# Altium PCB PCB1_v01.PcbDoc
Units mm, origin at the board's own origin, x right, y up, seen from the top; angles counter-clockwise.
Board outline 100.71 x 75.2 mm, 2 copper layers (Top Layer, Bottom Layer); 128 components, 82 nets, 373 pads, 165 vias.
Unrouted connection lines stored in the file: 136.
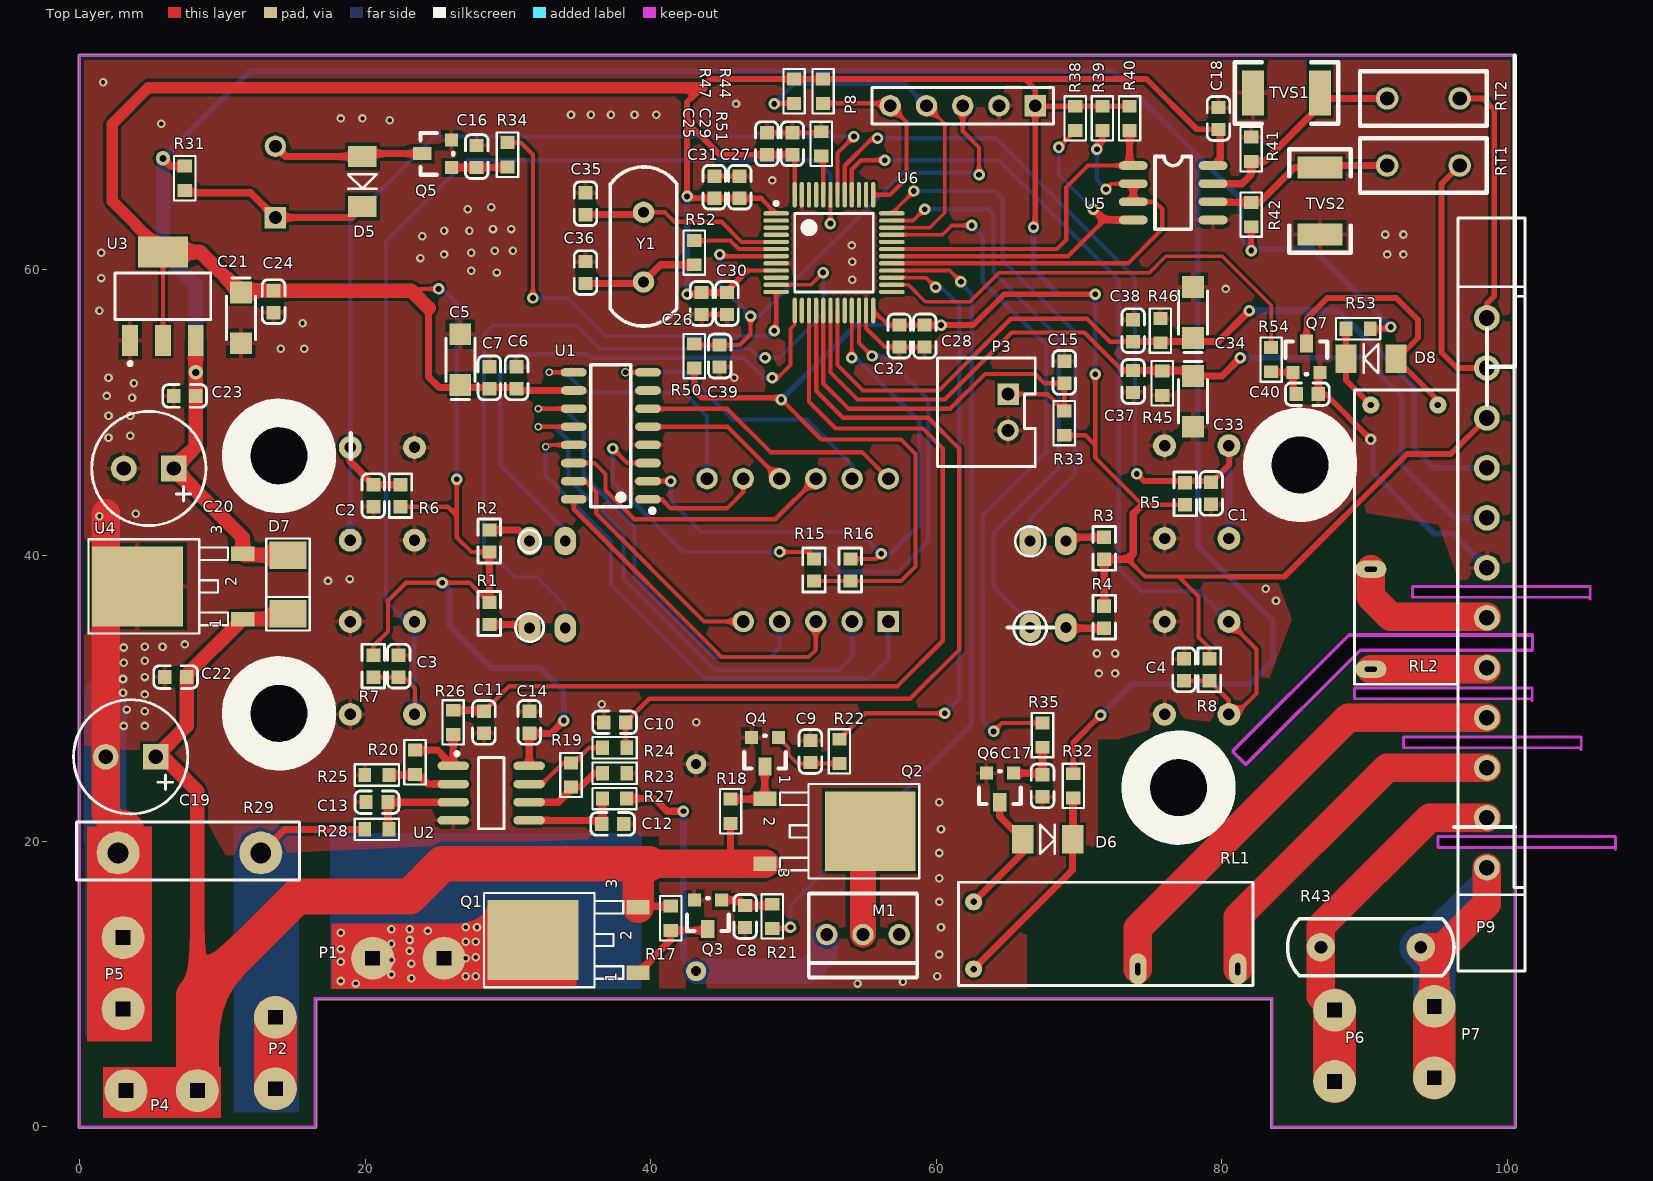
[diagram p0: Top Layer view]
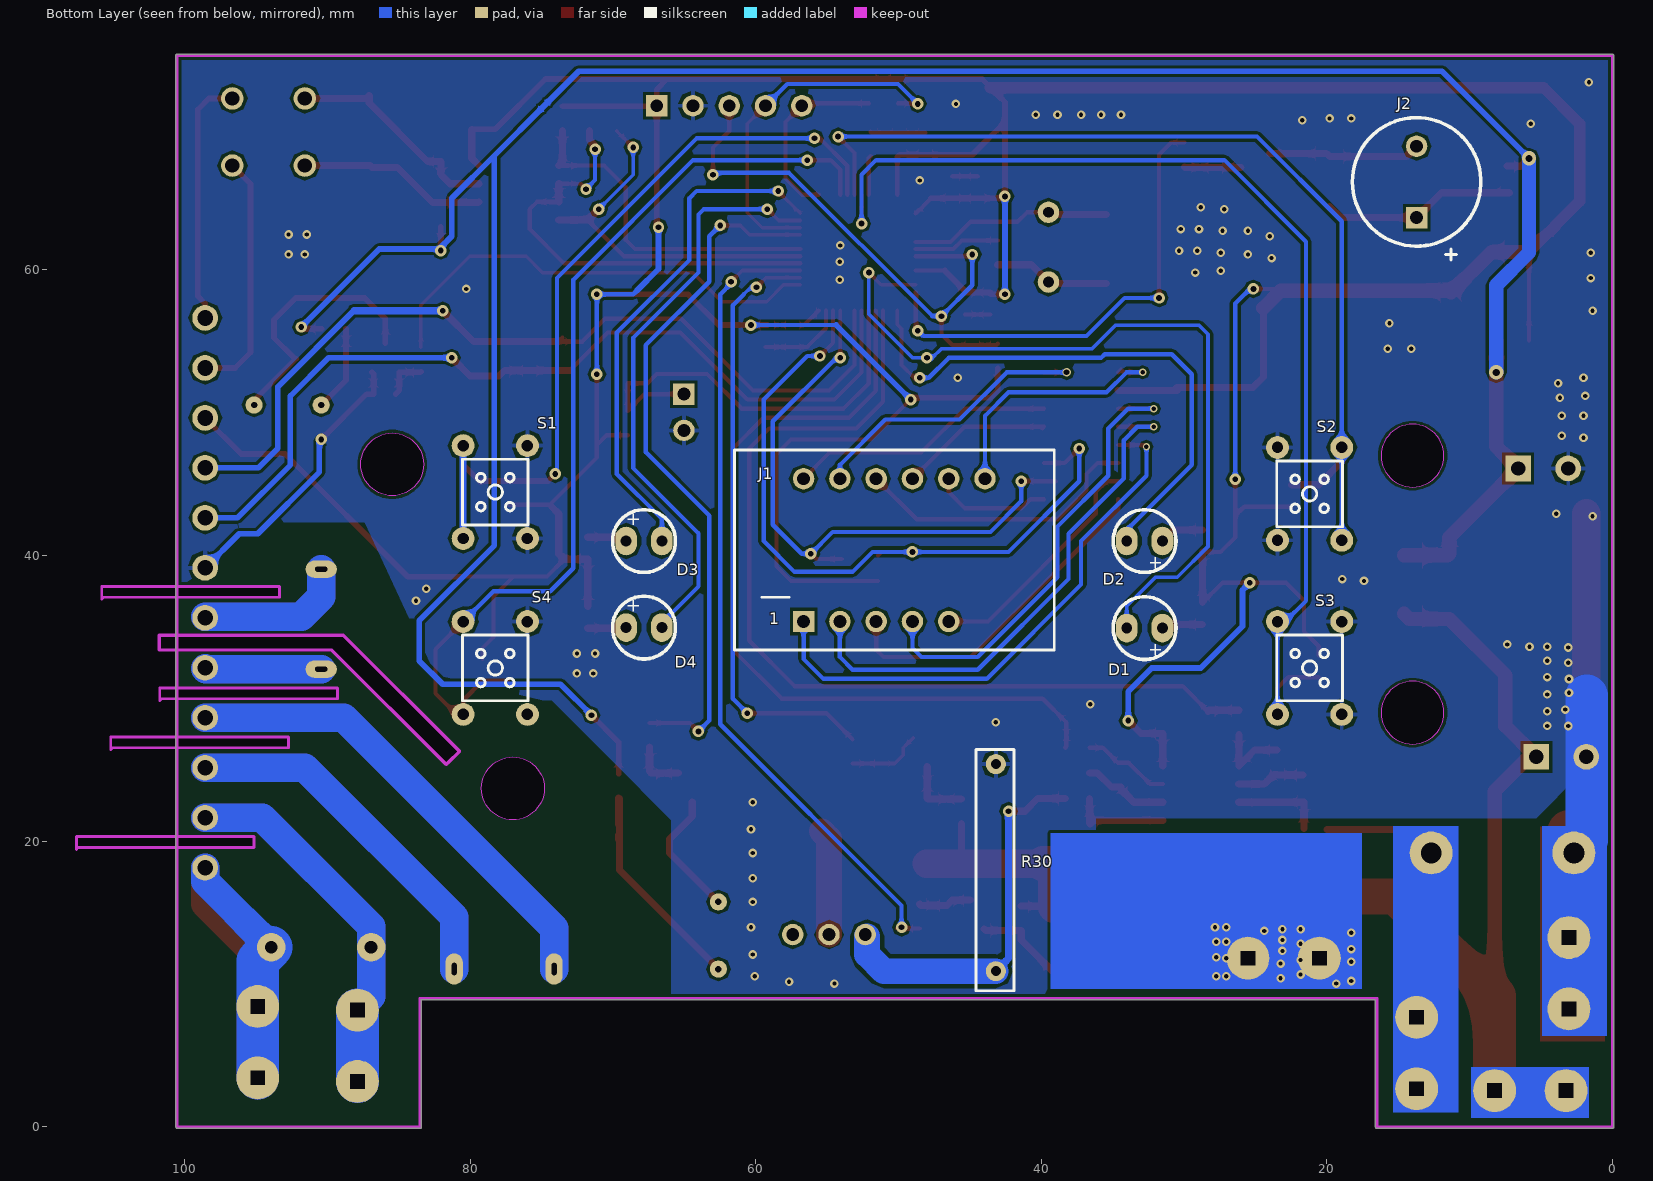
[diagram p1: Bottom Layer view, seen from below]

## Layer stack, top to bottom
Top Solder: solder mask 0.0102, Solder Resist, Dk 3.5
Top Layer: signal copper 0.0356
Dielectric 1: dielectric 0.32, FR-4, Dk 4.8
Bottom Layer: signal copper 0.0356
Bottom Solder: solder mask 0.0102, Solder Resist, Dk 3.5

## Board outline
-0.1,0 ccw(c0,0) 0,-0.1 16.5,-0.1 ccw(c16.5,0) 16.6,0 16.6,8.9 83.4,8.9 83.4,0.061 ccw(c83.5,0.061) 83.404,0.031 ccw(c83.5,0) 83.5,-0.1 100.5,-0.1 ccw(c100.5,0) 100.6,0 100.6,74.949 ccw(c100.514,75) 100.614,75 ccw(c100.514,75) 100.514,75.1 0,75.1 ccw(c0,75) -0.1,75
cut-out: 14,44.8 cw(c14,47) 11.8,47 cw(c14,47) 14,49.2 cw(c14,47) 16.2,47 cw(c14,47)
cut-out: 14,26.8 cw(c14,29) 11.8,29 cw(c14,29) 14,31.2 cw(c14,29) 16.2,29 cw(c14,29)
cut-out: 83.25,46.39 ccw(c85.45,46.39) 85.45,44.19 ccw(c85.45,46.39) 87.65,46.39 ccw(c85.45,46.39) 85.45,48.59 ccw(c85.45,46.39)
cut-out: 74.8,23.7 ccw(c77,23.7) 77,21.5 ccw(c77,23.7) 79.2,23.7 ccw(c77,23.7) 77,25.9 ccw(c77,23.7)
cut-out: 81.463,25.456 ccw(c81.534,25.527) 81.566,25.432 ccw(c81.661,25.4) 81.732,25.329 89.704,33.301 101.727,33.301 ccw(c101.727,33.401) 101.827,33.401 101.827,34.417 ccw(c101.727,34.417) 101.727,34.517 88.9,34.517 ccw(c88.9,34.417) 88.829,34.488 80.701,26.36 ccw(c80.772,26.289) 80.701,26.218
cut-out: 95.123,19.558 95.123,20.32 107.569,20.32 107.569,19.431 107.442,19.558
cut-out: 92.71,26.543 92.71,27.305 105.156,27.305 105.156,26.416 105.029,26.543
cut-out: 93.345,37.084 93.345,37.846 105.791,37.846 105.791,36.957 105.664,37.084
cut-out: 89.281,29.972 89.281,30.734 101.727,30.734 101.727,29.845 101.6,29.972

## Design rules (kind name [scope] priority, off if disabled: settings)
Clearance [All] p1: gap=0.2 ignorepadtopadclearanceinfootprint=FALSE except(0: Arc-Hole Track-Hole SMDPad-Hole THPad-Hole Via-Hole Fill-Hole Poly-Hole Region-Hole Text-Hole)
PolygonConnect PolygonConnect_1 [IsVia] p1: connectstyle=Direct reliefconductorwidth=0.3 reliefentries=4 polygonreliefangle="90 Angle" airgapwidth=0.254
PolygonConnect [All] p2: connectstyle=Relief reliefconductorwidth=0.3 reliefentries=4 polygonreliefangle="90 Angle" airgapwidth=0.254
RoutingVias [All] p1: holewidth=0.4 width=0.9 viastyle="Through Hole" minholewidth=0.305 minwidth=0.305 maxholewidth=0.711 maxwidth=1.27
SolderMaskExpansion [All] p1: expansion=0.102
UnRoutedNet UnRoutedNet_1 [All] p1:
UnRoutedNet [All] p2:
Width [All] p1: maxlimit=5 minlimit=0.2 preferedwidth=0.254
29 further rules are at their usual default settings.

## Classes and differential pairs
component class Main: C8 C9 C10 C11 C12 C13 C14 C15 C16 C17 C40 D5 D6 D8 J2 M1 P1 P2 P3 Q1 Q2 Q3 Q4 Q5 Q6 Q7 R17 R18 R19 R20 R21 R22 R23 R24 R25 R26 R27 R28 R29 R30 R31 R32 R33 R34 R35 R53 R54 RL1 RL2 U2
component class HMI: C1 C2 C3 C4 C5 C6 C7 D1 D2 D3 D4 J1 R1 R2 R3 R4 R5 R6 R7 R8 R15 R16 S1 S2 S3 S4 U1
component class CPU: C18 C19 C20 C21 C22 C23 C24 C25 C26 C27 C28 C29 C30 C31 C32 C33 C34 C35 C36 C37 C38 C39 D7 P4 P5 P6 P7 P8 P9 R38 R39 R40 R41 R42 R43 R44 R45 R46 R47 R50 R51 R52 RT1 RT2 TVS1 TVS2 U3 U4 U5 U6 Y1

## Components (designator, comment, footprint, x,y, rotation, side; value= is the part's Value field where it differs from the comment)
C1 "100nF (104) 10% 50V" 0603_C 79.248,44.358 r90 top
C2 "100nF (104) 10% 50V" 0603_C 20.574,44.196 r90 top
C3 "100nF (104) 10% 50V" 0603_C 22.352,32.258 r270 top
C4 "100nF (104) 10% 50V" 0603_C 77.343,32.004 r270 top
C5 "4.7uF/16V" CAP-1206 26.67,53.721 r90 top value=4.7uF
C6 "1uF (105) 10% 50V" 0603_C 30.607,52.451 r270 top
C7 "100nF (104) 10% 50V" 0603_C 28.702,52.451 r270 top
C8 "100nF (104) 10% 50V" 0603_C 46.609,14.732 r90 top
C9 "100nF (104) 10% 50V" 0603_C 51.181,26.289 r270 top
C10 "100nF (104) 10% 50V" 0603_C 37.473,28.321 r0 top
C11 "100nF (104) 10% 50V" 0603_C 28.321,28.321 r90 top
C12 "100nF (104) 10% 50V" 0603_C 37.338,21.209 r180 top
C13 "100nF (104) 10% 50V" 0603_C 20.828,22.733 r0 top
C14 "100nF (104) 10% 50V" 0603_C 31.496,28.321 r270 top
C15 "100nF (104) 10% 50V" 0603_C 68.961,52.832 r270 top
C16 "100nF (104) 10% 50V" 0603_C 27.813,67.945 r270 top
C17 "100nF (104) 10% 50V" 0603_C 67.437,23.876 r90 top
C18 "100nF (104) 10% 50V" 0603_C 79.756,70.612 r90 top
C19 "100uF/25V" C-RB-8 5.334,25.908 r180 top value=100uF
C20 "100uF/16V" C-RB-8 6.604,46.101 r180 top value=100uF
C21 "4.7uF/16V" CAP-1206 11.303,56.642 r270 top value=4.7uF
C22 "100nF (104) 10% 50V" 0603_C 6.731,31.496 r0 top
C23 "100nF (104) 10% 50V" 0603_C 7.366,51.181 r0 top
C24 "100nF (104) 10% 50V" 0603_C 13.589,57.785 r90 top
C25 "1uF (105) 10% 50V" 0603_C 48.133,68.842 r270 top
C26 "1uF (105) 10% 50V" 0603_C 43.561,57.658 r90 top
C27 "1uF (105) 10% 50V" 0603_C 46.228,65.794 r270 top
C28 "1uF (105) 10% 50V" 0603_C 59.182,55.372 r90 top
C29 "100nF (104) 10% 50V" 0603_C 49.911,68.842 r270 top
C30 "100nF (104) 10% 50V" 0603_C 45.339,57.658 r90 top
C31 "100nF (104) 10% 50V" 0603_C 44.45,65.794 r270 top
C32 "100nF (104) 10% 50V" 0603_C 57.404,55.372 r90 top
C33 "4.7uF/16V" CAP-1206 77.978,50.8 r270 top value=4.7uF
C34 "4.7uF/16V" CAP-1206 77.978,57.023 r90 top value=4.7uF
C35 "22pF (220) 5% 50V" 0603_C 35.433,64.643 r90 top
C36 "22pF (220) 5% 50V" 0603_C 35.433,59.817 r90 top
C37 "100nF (104) 10% 50V" 0603_C 73.787,52.197 r90 top
C38 "100nF (104) 10% 50V" 0603_C 73.787,55.753 r270 top
C39 "100nF (104) 10% 50V" 0603_C 44.831,53.975 r90 top
C40 "100nF (104) 10% 50V" 0603_C 85.979,51.308 r180 top
D1 "LED" LED(С) 32.766,34.925 r0 bottom locked
D2 "LED" LED(С) 32.766,41.021 r0 bottom locked
D3 "LED" LED(С) 67.818,41.021 r180 bottom locked
D4 "LED" LED(С) 67.818,34.96 r180 bottom locked
D5 "1N4148" DIODE-1206 19.812,67.945 r270 top
D6 "1N4148" DIODE-1206 66.04,20.135 r0 top
D7 "M7" DO214AC-SMA 14.605,37.973 r270 top
D8 "1N4148" DIODE-1206 92.185,53.791 r180 top
J1 "DPY-3CK" DYP-3BIT_2.8 50.292,40.386 r180 bottom locked
J2 "BEEP" Beep0905 13.716,66.167 r90 bottom
M1 "风机" connector3x2.5 54.864,13.462 r270 top
P1 "Cold+" ConSlice0.5 25.527,11.811 r180 top
P2 "Cold-" ConSlice0.5 13.716,2.667 r90 top
P3 "NTC" HDR1X2_2 65.024,50.038 r90 top
P4 "+12V" ConSlice0.5 8.255,2.54 r180 top
P5 "" ConSlice0.5 3.048,8.255 r90 top
P6 "L" ConSlice0.5 87.884,3.175 r90 top
P7 "N" ConSlice0.5 94.869,3.429 r90 top
P8 "Header 5" HDR1X5 66.929,71.501 r180 top
P9 "Header 12" HDR3.5-12P_1 98.552,56.642 r270 top
Q1 "IRFR5305" DPAK 35.433,13.081 r90 top
Q2 "IRFR5305" DPAK 51.689,20.701 r270 top
Q3 "SS8050" SOT-23 44.958,15.875 r180 top
Q4 "SS8050" SOT-23 48.952,27.254 r180 top
Q5 "SS8050" SOT-23 26.035,67.183 r90 top
Q6 "SS8050" SOT-23 65.405,24.765 r180 top
Q7 "SS8050" SOT-23 84.963,52.832 r0 top
R1 "2k" 0603_R 28.702,35.941 r270 top
R2 "2k" 0603_R 28.702,41.021 r90 top
R3 "2k" 0603_R 71.755,40.513 r90 top
R4 "2k" 0603_R 71.755,35.687 r270 top
R5 "10K" 0603_R 77.429,44.323 r270 top
R6 "10K" 0603_R 22.479,44.196 r270 top
R7 "10K" 0603_R 20.574,32.258 r90 top
R8 "10K" 0603_R 79.121,32.004 r90 top
R15 "10K" 0603_R 51.435,38.989 r270 top
R16 "10K" 0603_R 53.975,38.989 r270 top
R17 "4.7K" RESC1608N-R0603 41.402,14.605 r270 top
R18 "4.7K" RESC1608N-R0603 45.593,22.098 r90 top
R19 "30K" RESC1608N-R0603 34.417,24.638 r270 top
R20 "100K" RESC1608N-R0603 23.495,25.527 r270 top
R21 "1K" RESC1608N-R0603 48.514,14.732 r270 top
R22 "1K" RESC1608N-R0603 53.213,26.289 r90 top
R23 "2k" RESC1608N-R0603 37.473,24.765 r0 top
R24 "10K" RESC1608N-R0603 37.473,26.543 r180 top
R25 "2k" RESC1608N-R0603 20.828,24.638 r180 top
R26 "10K" RESC1608N-R0603 26.162,28.321 r270 top
R27 "2k" RESC1608N-R0603 37.465,22.987 r0 top
R28 "2k" RESC1608N-R0603 20.828,20.828 r180 top
R29 "30mR" Rsense10mm 2.7,19.177 r0 top value=2mR
R30 "2.2R" R0.4x14.5 43.18,25.4 r270 bottom value=2mR
R31 "3.3R" RESC1608N-R0603 7.366,66.421 r270 top
R32 "3.3R" RESC1608N-R0603 69.596,23.876 r270 top
R33 "100K" RESC1608N-R0603 68.961,49.276 r90 top
R34 "1K" RESC1608N-R0603 29.972,68.072 r90 top
R35 "1K" RESC1608N-R0603 67.437,27.432 r90 top
R38 "4.7K" RESC1608N-R0603 69.723,70.612 r270 top
R39 "4.7K" RESC1608N-R0603 71.628,70.612 r270 top
R40 "4.7K" RESC1608N-R0603 73.533,70.612 r270 top
R41 "10k" RESC1608N-R0603 82.042,68.453 r270 top
R42 "10k" RESC1608N-R0603 82.042,63.881 r270 top
R43 "10D471" 10D471K 90.424,12.573 r180 top
R44 "10k" RESC1608N-R0603 52.07,72.517 r270 top
R45 "100K" RESC1608N-R0603 75.819,52.07 r270 top
R46 "100K" RESC1608N-R0603 75.692,55.753 r90 top
R47 "10k" RESC1608N-R0603 50.038,72.517 r270 top
R50 "10k" RESC1608N-R0603 43.053,53.975 r90 top
R51 "100k" RESC1608N-R0603 51.943,68.834 r90 top
R52 "0R" RESC1608N-R0603 43.053,61.214 r270 top
R53 "3.3R" RESC1608N-R0603 89.535,55.88 r180 top
R54 "1K" RESC1608N-R0603 83.439,53.721 r90 top
RL1 "TXS2-24V" ALDP112 62.611,11.049 r0 top
RL2 "TXS2-24V" ALDP112 90.424,50.546 r270 top
RT1 "BK250-080" RAD0.2 96.647,67.31 r180 top
RT2 "BK250-080" RAD0.2 96.647,72.009 r180 top
S1 "SET/ESC" Switch_4_6*6 78.232,44.45 r270 bottom locked
S2 "Auto/Man" Switch_4_6*6 21.209,44.323 r90 bottom locked
S3 "Up" Switch_4_6*6 21.209,32.131 r270 bottom locked
S4 "Down" Switch_4_6*6 78.232,32.131 r270 bottom locked
TVS1 "SMBJ6.5CA" 1812 82.169,72.39 r0 top
TVS2 "SMBJ6.5CA" 1812 86.868,67.183 r270 top
U1 "TM1650" SOIC-16_150mil 37.211,48.387 r90 top
U2 "LM358" NSO8_N 28.829,23.368 r0 top
U3 "SPX1117-M3-3.3" SOT223 5.842,58.166 r0 top
U4 "LM78M05" DPAK 7.747,37.846 r90 top
U5 "SN65HVD3082" SO-8 73.787,67.31 r0 top
U6 "STM32F030C8T6" STM-LQFP48_N 52.832,61.214 r0 top
Y1 "8MHz" HC49S_th 39.497,61.595 r270 top

## Footprints (in the part's own frame and the unit in brackets; to place one, negate y for a bottom-side part, rotate by r counter-clockwise, add the part's x,y. Pads: shape width x height; smd on the part's side, far side on the other; paste and mask are expansions set on the pad)
10D471K [mm]
  round 2 hole 0.9: 1(-3.5,0) 2(3.5,0)
  silkscreen extent -5.83,-2 5.83,2
0603_C [mm]
  rect 0.93x0.98 smd: 1(-0.77,0) 2(0.77,0)
  silkscreen extent -1.53,-0.79 1.54,0.79, body extent -0.8,-0.4 0.8,0.4, height 0.3
0603_R [mm]
  rect 0.93x0.98 smd: 1(-0.77,0) 2(0.77,0)
  silkscreen extent -1.53,-0.79 1.54,0.79, body extent -0.85,-0.4 0.85,0.4, height 0.56
1812 [mil]
  rect 60x125 smd: 1(0,0) 2(185,0)
  silkscreen extent -50,-85 235,85
ALDP112 [mm]
  round 1.2 hole 0.45: 1(0,0) 2(0,4.7)
  rrect100% 1.2x2.2 hole 0.35 slot 0.85 at 90 deg: 3(11.5,0) 4(18.5,0)
  silkscreen extent -1.05,-1.14 19.56,6.08
Beep0905 [mm] "蜂鸣器"
  rect 1.5x1.5 hole 0.9: 1(-2.5,0)
  round 1.5 hole 0.9: 2(2.5,0)
  silkscreen extent -5.46,-4.5 4.5,4.5
C-RB-8 [mm] "35V 220UF电容"
  rect 1.8x1.8 hole 1: 1(0,0)
  round 1.8 hole 1: 2(3.5,0)
  silkscreen extent -2.25,-4 5.75,4
CAP-1206 [mil] "贴片元件"
  rect 60x60 smd: 1(-70,0) 2(70,0)
  silkscreen extent -110,-40 60,40, body extent -65,-35 65,35, height 39
connector3x2.5 [mm]
  round 1.5 hole 0.9: 1(0,-2.54) 2(0,0) 3(0,2.54)
  silkscreen extent -2.88,-3.81 3.01,3.81
ConSlice0.5 [mm]
  round 3 hole 1 square: 1(0,0) 2(5,0)
DIODE-1206 [mm] "玻璃封装二极管"
  rect 1.5x2 smd: 1(0,0) 2(3.5,0)
  silkscreen extent 1.25,-1 2.25,1
DO214AC-SMA [mil]
  rect 75x102 smd: 1(-80.7,0) 2(80.7,0)
  silkscreen extent -127,-60 127,60, body extent -104,-55 104,55, height 98
DPAK [mil]
  rect 40x64 smd: 1(-90,-145) 3(90,-145)
  rect 220x250 smd: 2(0,145)
  silkscreen extent -130,-104 130,280, body extent -130,-151 130,247, height 95
DYP-3BIT_2.8 [mm] "数码管"
  rect 1.5x1.5 hole 0.9: 1(-6.35,-5)
  round 1.5 hole 0.9: 2(-3.81,-5) 3(-1.27,-5) 4(1.27,-5) 5(3.81,-5) 7(6.35,5) 8(3.81,5) 9(1.27,5) 10(-1.27,5) 11(-3.81,5) 12(-6.35,5)
  silkscreen extent -11.2,-7 11.2,7
HC49S_th [mm]
  round 1.5 hole 0.75: 1(-2.44,0) 2(2.44,0)
  silkscreen extent -5.62,-2.32 5.52,2.33
HDR1X2_2 [mm] "Connector; Header; 2 Position"
  rect 1.5x1.5 hole 0.9: 1(1.27,0)
  round 1.5 hole 0.9: 2(-1.27,0)
  silkscreen extent -3.81,-1.91 3.81,4.95
HDR1X5 [mm] "Connector; Header; 5 Position"
  rect 1.5x1.5 hole 0.9: 1(0,0)
  round 1.5 hole 0.9: 2(2.54,0) 3(5.08,0) 4(7.62,0) 5(10.16,0)
  silkscreen extent -1.27,-1.27 11.43,1.27
HDR3.5-12P_1 [mm]
  round 1.8 hole 1.1: 1(0,0) 2(3.5,0) 3(7,0) 4(10.5,0) 5(14,0) 6(17.5,0) 7(21,0) 8(24.5,0) 9(28,0) 10(31.5,0) 11(35,0) 12(38.5,0)
  silkscreen extent -7,-2.03 45.72,2.67
LED(С) [mm]
  oval 1.524x2 hole 0.762: 1(-1.25,0) 2(1.25,0)
  silkscreen extent -2.2,-2.2 2.2,2.2
NSO8_N [mm] "SOIC-max660"
  oval 2.2x0.6 smd: 1(-2.654,1.905) 2(-2.654,0.635) 3(-2.654,-0.635) 4(-2.654,-1.905) 5(2.654,-1.905) 6(2.654,-0.635) 7(2.654,0.635) 8(2.654,1.905)
  silkscreen extent -2.52,-2.5 0.9,2.88, body extent -1.95,-2.45 1.95,2.45, height 1.75
R0.4x14.5 [mm]
  round 1.4 hole 0.7: 1(0,0) 2(14.5,0)
  silkscreen extent -1.02,-1.4 15.88,1.27
RAD0.2 [mil]
  round 62 hole 39.37: 1(0,0) 2(200,0)
  silkscreen extent -75,-75 275,75
RESC1608N-R0603 [mm]
  rect 0.9x1 smd mask+0.102: 1(-0.85,0) 2(0.85,0)
  silkscreen extent -1.55,-0.75 1.55,0.75, body extent -0.85,-0.48 0.85,0.48, height 0.6
Rsense10mm [mm]
  round 3 hole 1.45: 1(0,0) 2(10,0)
  silkscreen extent -2.92,-1.91 12.7,2.16
SO-8 [mil]
  oval 80x24 smd: 1(0,0) 2(0,-50) 3(0,-100) 4(0,-150) 5(220,-150) 6(220,-100) 7(220,-50) 8(220,0)
  silkscreen extent 60,-175 160,25
SOIC-16_150mil [mm]
  oval 0.6x1.8 smd: 1(-4.445,-2.6) 2(-3.175,-2.6) 3(-1.905,-2.6) 4(-0.635,-2.6) 5(0.635,-2.6) 6(1.905,-2.6) 7(3.175,-2.6) 8(4.445,-2.6) 9(4.445,2.6) 10(3.175,2.6) 11(1.905,2.6) 12(0.635,2.6) 13(-0.635,2.6) 14(-1.905,2.6) 15(-3.175,2.6) 16(-4.445,2.6)
  silkscreen extent -5.4,-3.05 4.97,1.4
SOT223 [mm]
  rect 1.1x2.15 smd: 1(-2.3,-3.1) 2(0,-3.1) 3(2.3,-3.1)
  rect 3.5x2.15 smd: 2(0,3.1)
  silkscreen extent -3.35,-4.85 3.35,1.63
SOT-23 [mil]
  rect 36x36 smd: 1(0,0) 2(75,0)
  rect 36x50 smd: 3(38,80)
  silkscreen extent -20,-5 95,85
STM-LQFP48_N [mm] "QFP, 48-Leads, Body 7x7mm, Pitch 0.5mm, IPC Medium Density"
  oval 1.8x0.3 smd: 1(-4.05,2.75) 2(-4.05,2.25) 3(-4.05,1.75) 4(-4.05,1.25) 5(-4.05,0.75) 6(-4.05,0.25) 7(-4.05,-0.25) 8(-4.05,-0.75) 9(-4.05,-1.25) 10(-4.05,-1.75) 11(-4.05,-2.25) 12(-4.05,-2.75) 25(4.05,-2.75) 26(4.05,-2.25) 27(4.05,-1.75) 28(4.05,-1.25) 29(4.05,-0.75) 30(4.05,-0.25) 31(4.05,0.25) 32(4.05,0.75) 33(4.05,1.25) 34(4.05,1.75) 35(4.05,2.25) 36(4.05,2.75)
  oval 0.3x1.8 smd: 13(-2.75,-4.05) 14(-2.25,-4.05) 15(-1.75,-4.05) 16(-1.25,-4.05) 17(-0.75,-4.05) 18(-0.25,-4.05) 19(0.25,-4.05) 20(0.75,-4.05) 21(1.25,-4.05) 22(1.75,-4.05) 23(2.25,-4.05) 24(2.75,-4.05) 37(2.75,4.05) 38(2.25,4.05) 39(1.75,4.05) 40(1.25,4.05) 41(0.75,4.05) 42(0.25,4.05) 43(-0.25,4.05) 44(-0.75,4.05) 45(-1.25,4.05) 46(-1.75,4.05) 47(-2.25,4.05) 48(-2.75,4.05)
  silkscreen extent -4.17,-2.75 2.75,3.57, body extent -3.5,-3.5 3.5,3.5, height 1.6
Switch_4_6*6 [mm]
  round 1.6 hole 0.8: 1(-3.25,2.25) 1(3.25,2.25) 2(-3.25,-2.25) 2(3.25,-2.25)
  silkscreen extent -2.3,-2.3 2.3,2.3

## Part data
C1 C2 C3 C4 C7 C8 C9 C10 C11 C12 C13 C14 C15 C16 C17 C18 C22 C23 C24 C29 C30 C31 C32 C37 C38 C39 C40: library part "0603 100nF (104) 10% 50V", "贴片电容", Package=0603, SuppliersPartNumber=C14663, =100nF, ComponentLink1Description=供应商, ComponentLink1URL=http://www.szlcsc.com/product/details_15331.html, Supplier=LC
C5 C21 C33 C34: library part "Cap Pol", "4.7uF/16V钽电容", LatestRevisionDate=17-Jul-2002, LatestRevisionNote="Re-released for DXP Platform.", PackageReference=RB7.6-15, Published=8-Jun-2000, Publisher="Altium Limited", Vol=16V
C6 C25 C26 C27 C28: library part "0603 1uF (105) 10% 50V", "贴片电容", Package=0603, SuppliersPartNumber=C15849, =1uF, ComponentLink1Description=供应商, ComponentLink1URL=http://www.szlcsc.com/product/details_16531.html, Supplier=LC
C19 C20: library part "Cap Pol", LatestRevisionDate=17-Jul-2002, LatestRevisionNote="Re-released for DXP Platform.", PackageReference=RB7.6-15, Published=8-Jun-2000, Publisher="Altium Limited"
  C19: Vol=25V
  C20: Vol=16V
C35 C36: library part "0603 22pF (220) 5% 50V", "贴片电容", Package=0603, SuppliersPartNumber=C1653, =22pF, ComponentLink1Description=供应商, ComponentLink1URL=http://www.szlcsc.com/product/details_2005.html, Supplier=LC
D1 D2 D3 D4: library part LED0, "Typical INFRARED GaAs LED", LatestRevisionDate=08-Jul-2005, LatestRevisionNote="Mech Layer 1 removed.", PackageReference=LED-0, Published=8-Jun-2000, Publisher="Altium Limited"
D5 D6 D7 D8: library part Diode, "二极管", PackageDocument=Sep-1996, Code_JEDEC=DO-214-AB, LatestRevisionDate=17-Jul-2002, LatestRevisionNote="Re-released for DXP Platform.", PackageReference=SMC, Published=8-Jun-2000, Publisher="Altium Limited"
  D5: Type=1N4148
  D6 D7 D8: Type=M7
J1: library part DPY-3CK_1, "共阴3位数码管"
J2: "蜂鸣器"
M1: "MALE CONN. 3 POLES P=7.62mm", Case_size=-, Mfr_name1=WEIDMULLER, Mfr_Part_Number1=1625260000, Approved="LANZONI L.", Datasheet="K:\ORCAD CAPTURE CIS DATABASE\DATASHEET\CONNECTORS", Export_Control=N.A., Height=12, Last_rev_date=L6622, Make_date=L6622, Max_operating_temp=-, Max_storage_temp=-, Min_operating_temp=-, Min_storage_temp=-, Nr_pole=3, Nr_row=1, Part_type=MALE\THT, Plating=-, Prepared="BONOMI P.", RoHs=True, RU_code=RU6199001, Solderability_temp=-, Valore=1625260000, Width=8.5
P1 P2 P3 P4 P5 P6 P7: library part "Header 2", "Header, 2-Pin", LatestRevisionDate=17-Jul-2002, LatestRevisionNote="Re-released for DXP Platform.", Publisher="Altium Limited"
P8: "Header, 5-Pin", LatestRevisionDate=17-Jul-2002, LatestRevisionNote="Re-released for DXP Platform.", Publisher="Altium Limited"
P9: "Header, 12-Pin", LatestRevisionDate=17-Jul-2002, LatestRevisionNote="Re-released for DXP Platform.", Publisher="Altium Limited"
Q1 Q2: "P-CH MOSFET LOGIC LEVEL 12A 60V SMD", Case_size=DPAK, Max_operating_temp=+175°C, Mfr_name1=ST, Mfr_Part_Number1=STD12NF06L, Min_operating_temp=-55°C, PackageID=D-PAK_AA_PITCH2.286MM_2PINS, Solderability_temp="10s at 275°C", Tolerance=-, Approved="MANZOLI R.", Datasheet="K:\ORCAD CAPTURE CIS DATABASE\DATASHEET\DISCRETE", Export Control=N.A., Last_rev_date=L3084_DT, Make_date=L2587_DT, Max_storage_temp=+175°C, Min_storage_temp=-55°C, Notes="ST: / STD12NE06L-T4 is obsolete", Part_type=MOSFET\N-CHANNEL\SMD, Prepared="BONOMI P.", RoHs=True, RU_code=RU5189002, Valore=IRFR5305
Q3 Q4 Q5 Q6 Q7: "NPN贴片三极管", PackageDocument=Sep-1998, Code_JEDEC=TO-92A, ComponentLink1Description="Manufacturer Link", ComponentLink1URL=http://www.fairchildsemi.com/, ComponentLink2Description=Datasheet, ComponentLink2URL=http://www.fairchildsemi.com/ds/2N%2F2N3904.pdf, DatasheetDocument=1997, LatestRevisionDate=15-Jan-2003, LatestRevisionNote="PCB Footprint 'BCY-W3/D4.7' replaced", PackageReference=TO-92A, Published=8-Jun-2000, Publisher="Altium Limited"
R1 R2 R3 R4 R23 R25 R27 R28: library part RES1, "2k/±10%", 零件名称=Ì
R5 R6 R7 R8 R15 R16 R24 R26: library part RES1, "10K/±10%", 零件名称=Ì
R17 R18 R38 R39 R40: library part RES1, "4.7K/±10%", 零件名称=Ì
R19: library part RES1, "30K/±1%", 零件名称=Ì
R20 R33 R45 R46 R51: library part RES1, "100K/±10%", 零件名称=Ì
R21 R22 R34 R35 R54: library part RES1, "1K/±10%", 零件名称=Ì
R29 R30: library part Res1, "Resistor", LatestRevisionDate=17-Jul-2002, LatestRevisionNote="Re-released for DXP Platform.", PackageDescription="Axial Device, Thru-Hole; 2 Leads; 0.3 in Pin Spacing", PackageReference=AXIAL-0.3, Published=8-Jun-2000, Publisher="Altium Limited"
R31 R32 R53: library part RES1, "3.3R/±10%", 零件名称=Ì
R41 R42 R44 R47 R50: library part RES1, "10k/±10%", 零件名称=Ì
R43: library part "Res Varistor", "Varistor (Voltage-Sensitive Resistor)", Code_IPC=RESC2012, LatestRevisionDate=29-May-2009, LatestRevisionNote="IPC-7351 Footprint Added.", PackageDescription="Chip Resistor 0805 Case Size", PackageReference=6-0805, PackageVersion=Mar-2003, Published=24-Mar-1999, Publisher="Altium Limited"
R52: library part RES1, "0R±10%", 零件名称=Ì
RL1 RL2: "MONOSTABLE RELAY 2POLES 110V 1A COIL24V", Case_size=THT, Max_operating_temp=+70°C, Mfr_name1=PANASONIC, Min_operating_temp=-40°C, Rated_voltage=24, Solderability_temp=-, Approved="LANZONI L.", Datasheet="K:\ORCAD CAPTURE CIS DATABASE\DATASHEET\RELAIS", Export_Control=N.A., Height=8.2, Last_rev_date=L9352, Length=15, Life="5x10^7 operations", Make_date=L9352, Max_storage_temp=+70°C, Mfr_Part_Number1=TXS2-24V, Min_storage_temp=-40°C, Part_type=MONOSTABILE\THT, Prepared="BONOMI P.", RoHs=True, RU_code=RU6550001, Valore=TXS2-24V, Width=7.4
RT1 RT2: library part PTC-Thermistor, "热敏电阻"
S1 S2 S3 S4: library part SW-PB, "6*6*5四脚直插轻触开关", 零件名称=Ö
TVS1 TVS2: library part TVS管-贴片, "TVS"
U2: "双运放"
U3: library part "IC-SPX1117M3-L-3.3 工业级 SOT-223 SIPEX", LH=I03-011173-601, U_1002（U_1002）=SIPE, U_200002（U_200002）=SPX1117M3-L-3., U_200003（U_200003）=工, U_200004（U_200004）=SOT-22, U_CL2_ITEMM_00（U_CL2_ITEMM_00）=I03-011173-60, U_CL2_ITEMR_00（U_CL2_ITEMR_00）="SPX1117M3-L-3.3 工业级 SOT-223 S", U_ITEM_ID（U_ITEM_ID）=Part0000306, U_OBJECT_NAME（U_OBJECT_NAME）=Ð, U_TABLE=U_IC
U4: library part LDO-78XX_1, PART CODE=?
U5: library part RS485
U6: I/Os (High Current)=39, Operating Frequency(F) (Processor speed) (MHz)=48, Supplier Part Number 1=497-14043-ND, Supply Voltage(Vcc) min (V)=2.4, ComponentLink1Description="Manufacturer URL", ComponentLink1URL=http://www.st.com/web/en/home.html, ComponentLink2Description=Datasheet, ComponentLink2URL=http://www.st.com/st-web-ui/static/active/en/resource/technical/document/datasheet/DM00088500.pdf, ComponentLink3Description="Package Specification", ComponentLink3URL=http://www.st.com/st-web-ui/static/active/en/resource/technical/document/datasheet/DM00058181.pdf, Core="ARM Cortex-M0", DatasheetVersion="Rev. 1", FLASH Size (Prog) (kB)=64, Internal RAM Size (kB)=8, Mounting Technology="Surface Mount", PackageDescription="48-Pin Low Profile Quad Flat Package, 7 x 7 mm Body, 0.5 mm Pitch", PackageReference=LQFP48, PackageVersion="Rev. 6, 06/2013", Packing=Tray, PartNumber=STM32F030C8T6, Supplier 1=Digi-Key, Supplier 2=Newark, Supplier 3=Mouser, Supplier Part Number 2=06X3647, Supplier Part Number 3=511-STM32F030C8T6
Y1: library part RU5608001, "QUARTZ 8MHz SMD", Case_size=SMD, Mfr_name1=2B-ELETTRONICA, Mfr_Part_Number1=TP0871/F, Approved="MANZOLI R.", Datasheet="K:\ORCAD CAPTURE CIS DATABASE\DATASHEET\QUARTZ_RESONATOR", Export_Control=N.A., Last_rev_date=L3084_DT, Make_date=L2587_DT, PackageID=RU5608001, Part_type=QUARTZ\SMD, Prepared="BONOMI P.", RoHs=True, RU_code=RU5608001, Valore=8MHz

## Via types
v1: diameter 0.6, hole 0.3, Top Layer to Bottom Layer, 108 vias
v2: diameter 0.8, hole 0.4, Top Layer to Bottom Layer, 50 vias
v3: diameter 0.508, hole 0.305, Top Layer to Bottom Layer, 4 vias
v4: diameter 1, hole 0.5, Top Layer to Bottom Layer, 2 vias
v5: diameter 0.6, hole 0.4, Top Layer to Bottom Layer, 1 vias

## Nets (pads, with @x,y where several pads share a name; then routed paths per layer and width w, separated by ;. In a path a pad name is that pad's centre, name@x,y a point inside that pad or via, vN(x,y) a via of type N, cw(c..) or ccw(c..) an arc to the next point about the centre after c; other vN are vias at no path point)
3.3V: C5.1 C6.2 C7.2 C14.2 C18.1 C21.1 C24.2 C25.2 C26.2 C27.2 C28.2 C29.2 C30.2 C31.2 C32.2 P8.1 P9.3 R1.1 R2.1 R3.1 R4.1 R5.2 R6.2 R7.2 R8.2 R15.2 R16.2 R33.1 R38.1 R39.1 R40.1 R44.1 R47.1 R50.1 U1.10 U2.8 U3.2 U5.8 U6.1 U6.9 U6.24 U6.48 | length 397.5
  Top Layer w0.3: U3.2@5.842,55.066 U3.2@5.842,61.266 ; R7.2 20.574,33.655 21.598,34.679 21.598,36.822 21.59,36.83 22.86,38.1 v2(25.4,38.1) 27.313,38.1 R1.1 ; R6.2 25.789,43.426 26.416,42.799 ; 23.233,58.555 23.352,58.674 v2(25.146,58.674) ; v2(26.416,45.339) 26.416,42.799 ; R2.1 27.44,40.251 26.416,41.275 26.416,42.799 ; C30.2 46.875,59.964 ; 46.736,59.964 46.875,59.964 ; 47.722,65.024 U6.1 ; U6.9 46.875,59.964 ; v2(49.149,50.927) 51.943,48.133 57.531,48.133 58.547,47.117 58.547,39.243 57.523,38.219 R16.2 R15.2 ; U6.48 C29.2@50.082,67.901 ; U6.24 56.604,56.142 C32.2 C28.2 ; R33.1 70.446,48.426 71.12,47.752 ; v2(71.12,52.705) 71.12,47.752 ; 73.398,39.743 74.611,38.53 76.962,38.53 ; R5.2 74.43,43.553 71.12,46.863 71.12,47.752 ; R8.2 79.121,33.528 78.359,34.29 78.359,37.133 76.962,38.53 ; 80.486,38.513 80.469,38.53 76.962,38.53
  Top Layer w0.4: v2(42.545,58.293) C26.2@43.561,58.293 ; R50.1 43.053,51.562 43.561,51.054 49.022,51.054 v2(49.149,50.927) ; C26.2 C30.2 ; C30.2@45.27,58.498 46.736,59.964 ; 47.722,65.024 C27.2 C31.2 42.672,65.024 v2(42.545,65.151) 42.545,70.358 ; C29.2@50.082,67.901 C29.2 C25.2 44.831,68.072 42.545,70.358 ; C28.2 v2(60.333,56.142) 62.588,56.142 64.739,58.293 v2(71.12,58.293) ; v2(66.802,62.992) 66.929,63.119 P8.1 ; R40.1 R39.1 R38.1 66.968,71.462 P8.1 ; C18.1@79.629,69.85 78.232,69.85 74.715,73.367 66.206,73.367 ; 80.486,38.513 84.36,38.513 92.964,47.117 96.027,47.117 P9.3 ; 42.545,70.358 42.545,71.755 43.561,72.771 44.157,73.367 R47.1 R44.1 66.206,73.367 ; 66.206,73.367 66.929,72.644 P8.1
  Top Layer w0.5: 24.447,57.34 24.447,52.514 25.193,51.769 30.519,51.769 C6.2 ; R1.1 R2.1 ; C6.2@30.416,51.625 30.48,51.562 U1.10 ; U2.8 31.496,25.286 C14.2 33.012,27.551 v2(33.909,28.448) ; R4.1 R3.1 73.398,39.743 73.787,40.132 73.787,42.926 74.295,43.434 ; U5.8 79.883,67.818 79.883,69.842 C18.1@79.803,69.762
  Top Layer w0.8: U3.2@5.842,61.266 2.286,64.822 2.286,70.231 4.826,72.771 43.561,72.771
  Top Layer w1: U3.2@5.842,61.266 8.457,61.266 C21.1 11.438,58.555 C24.2 23.233,58.555 24.447,57.34
  Bottom Layer w0.3: v2(25.146,58.674) 25.4,58.674 26.416,57.658 v2(26.416,45.339) ; 54.364,56.142 v2@60.079,56.142 ; 68.326,58.547 68.58,58.293 v2(71.12,58.293) ; v2@70.993,58.166 71.12,58.039 v2(71.12,52.705)
  Bottom Layer w0.4: v2(25.4,38.1) 25.908,37.592 25.908,35.052 28.829,32.131 32.258,32.131 33.909,30.48 v2(33.909,28.448) ; v2(42.545,58.293) v2(42.545,65.151) ; v2(49.149,50.927) 54.364,56.142 ; v2(66.802,62.992) 66.802,60.071 68.326,58.547
5V: C20.1 C23.2 D7.1 R31.1 R32.1 R42.2 R53.1 U3.3 U4.3 | length 195.4
  Top Layer w0.4: R32.1 69.596,26.924 v2(71.501,28.829) ; v2(82.042,61.36) R42.2 ; R53.1 91.694,55.88 v2(91.821,56.007)
  Top Layer w0.5: v4(5.842,67.818) 6.389,67.271 R31.1
  Top Layer w1: U3.3 8.136,55.06 v4(8.136,52.832) 8.136,52.451 C23.2 8.136,47.633 C20.1 11.43,41.275 U4.3 11.539,40.023 D7.1
  Bottom Layer w0.4: v4(5.842,67.818) 11.938,73.914 72.39,73.914 74.803,71.501 78.295,68.008 ; v2(71.501,28.829) 73.66,30.988 81.915,30.988 83.566,32.639 83.566,35.433 78.295,40.703 78.295,68.008 ; v2(82.042,61.36) v2@82.042,61.468 ; v2(91.821,56.007) 86.36,61.468 v2@82.042,61.468 ; 78.295,68.008 81.28,65.024 81.28,62.357 82.042,61.595 v2@82.042,61.468
  Bottom Layer w1: v4(5.842,67.818) 5.842,61.222 8.136,58.928 v4(8.136,52.832)
12V: C19.1 C22.2 D7.2 P4.1 P4.2 Q1.3 Q2.3 R17.1 R18.1 U4.1 | length 97.8
  Top Layer w0.5: Q1.3 39.204,15.455 R17.1 ; R18.1 45.593,19.05 46.228,18.415
  Top Layer w1: 8.255,9.144 8.255,23.495 5.842,25.908 C19.1 7.501,28.075 C22.2 7.501,31.631 U4.1 14.242,35.56 D7.2
  Top Layer w2: 39.878,18.415 46.228,18.415 Q2.3
  Top Layer w2.2: Q1.3 39.116,17.653 39.878,18.415
  Top Layer w2.5: 8.255,9.144 15.24,16.129 23.114,16.129 25.4,18.415 39.878,18.415
  Top Layer w3: P4.2 P4.1 8.255,9.144
485A: P9.1 RT2.1 | length 17.5
  Top Layer w0.4: RT2.1 98.298,72.009 99.06,71.247 99.06,58.166 98.552,57.658 P9.1
485B: P9.2 RT1.1 | length 17.2
  Top Layer w0.4: RT1.1 95.377,66.04 95.377,54.229 96.464,53.142 P9.2
DE: R39.2 U5.2 U5.3 U6.29 | length 31.4
  Top Layer w0.254: v2(71.882,65.659) 72.263,66.04 U5.2
  Top Layer w0.3: U6.29 73.418,60.464 75.819,62.865 75.819,64.262 75.311,64.77 U5.3
  Top Layer w0.5: v2(71.247,68.453) 71.247,68.707 71.628,69.088 R39.2 ; U5.3 U5.2
  Bottom Layer w0.254: v2(71.247,68.453) 71.247,66.294 v2(71.882,65.659)
GND: C1.1 C2.1 C3.1 C4.1 C5.2 C6.1 C7.1 C8.1 C9.1 C10.1 C11.1 C12.1 C13.1 C14.1 C15.1 C16.1 C17.1 C18.2 C19.2 C20.2 C21.2 C22.1 C23.1 C24.1 C25.1 C26.1 C27.1 C28.1 C29.1 C30.1 C31.1 C32.1 C33.2 C34.2 C35.2 C36.2 C37.1 C38.1 C39.1 C40.1 P3.2 P5.1 P5.2 P8.2 P9.6 Q3.2 Q4.2 Q5.2 Q6.2 Q7.2 R23.2 R25.2 R29.1 R30.1 R41.1 R45.2 R46.2 R51.2 S1.1 S2.1 S3.1 S4.1 TVS1.1 TVS2.2 U1.4 U2.4 U3.1 U4.2 U5.5 U6.8 U6.23 U6.47 | length 90.8
  Top Layer w0.3: C26.1 C30.1 ; C31.1 C27.1 ; C25.1 C29.1 51.871,69.612 R51.2 ; U6.23 55.082,55.916 56.396,54.602 C32.1 C28.1@59.309,54.602
  Top Layer w0.4: Q7.2 86.749,52.713 C40.1 87.249,51.308 v2(90.424,48.133)
  Top Layer w2: 1.834,42.976 C19.2 1.834,21.915 3.048,20.701 3.104,20.757
  Top Layer w3: P5.1 P5.2 3.048,20.701
  Bottom Layer w0.4: v2(90.424,48.133) 90.551,48.006 90.551,45.847 94.869,41.529 96.165,41.529 P9.6
  Bottom Layer w3: 1.8,30.162 1.8,20.077 R29.1 3.048,18.829 P5.2 P5.1
  other v1: 54.483,10.033 57.658,10.16 60.071,10.541 60.198,12.065 60.325,13.97 60.198,15.748 60.198,17.399 60.198,19.177 60.325,20.828 60.198,22.733 3.104,28.067 4.572,28.075 43.18,28.321 4.572,29.091 3.302,29.217 36.576,29.591 4.572,30.278 3.048,30.402 3.048,31.361 4.572,31.496 71.374,31.75 72.517,31.75 3.104,32.504 4.572,32.639 71.247,33.147 72.517,33.147 3.104,33.566 4.572,33.62 5.811,33.62 7.378,33.782 83.785,36.83 83.058,37.674 17.399,38.227 18.923,38.354 1.397,42.761 3.937,42.926 2.032,48.26 3.556,48.387 2.032,49.784 3.556,49.784 3.683,51.054 1.905,51.181 3.81,52.07 2.032,52.451 45.847,52.451 14.097,54.483 15.748,54.483 15.621,56.261 1.397,57.15 80.264,58.674 54.102,59.309 1.524,59.436 29.21,59.817 27.432,59.944 54.102,60.579 23.876,60.833 25.527,61.087 91.567,61.087 92.71,61.087 1.524,61.214 27.432,61.214 29.083,61.341 30.353,61.341 54.082,61.722 24.003,62.357 91.44,62.484 92.71,62.484 25.527,62.738 27.305,62.738 28.956,62.865 30.226,62.865 27.178,64.262 28.829,64.389 48.506,66.271 5.715,70.231 21.717,70.485 18.288,70.612 19.812,70.612 34.417,70.866 35.814,70.866 37.211,70.866 38.862,70.866 40.386,70.866 45.974,71.628 1.651,73.152
L: P6.1 P6.2 P9.11 R43.2 | length 52.1
  Top Layer w2: P6.2 86.924,9.135 R43.2 86.924,14.026 94.54,21.642 P9.11
  Top Layer w3: P6.1 P6.2
  Bottom Layer w2: P6.2 86.924,9.135 R43.2 86.924,14.026 94.54,21.642 P9.11
  Bottom Layer w3: P6.1 P6.2
N: P7.1 P7.2 P9.12 R43.1 | length 35
  Top Layer w2: P7.2 94.869,11.628 R43.1 95.504,12.573 98.552,15.621 P9.12
  Top Layer w3: P7.1 P7.2
  Bottom Layer w2: R43.1 98.552,17.201 P9.12
  Bottom Layer w3: R43.1 94.869,11.628 P7.2 P7.1
NetC1_2: C1.2 R5.1 S1.2 U6.41 | length 56
  Top Layer w0.3: U6.41 53.582,67.298 55.499,69.215 v2(55.88,69.215)
  Top Layer w0.4: v2(74.041,45.72) 74.541,45.22 79.156,45.22 C1.2 80.518,46.398 S1.2@80.518,46.99
  Top Layer w0.5: S1.2@80.482,47.7 80.518,47.664 S1.2@80.518,46.99
  Bottom Layer w0.3: v2(55.88,69.215) 64.135,69.215 73.914,59.436 v2@73.914,45.72
  Bottom Layer w0.5: S1.2@80.482,41.2 S1.2@80.482,47.7
NetC2_2: C2.2 R6.1 S2.2 U6.42 | length 70.1
  Top Layer w0.3: U6.42 53.082,68.195 v2(54.229,69.342)
  Top Layer w0.5: S2.2@19.177,47.355 18.959,47.573 18.959,46.581 C2.2 R6.1
  Bottom Layer w0.3: S2.2@18.959,41.073 18.959,47.573 18.959,63.409 24.892,69.342 v2(54.229,69.342)
NetC3_2: C3.2 R7.1 S3.2 U6.43 | length 78.7
  Top Layer w0.254: v2(52.582,63.25) U6.43
  Top Layer w0.3: R7.1 C3.2 22.705,31.488 23.495,30.698 S3.2@23.495,28.917
  Top Layer w0.5: S3.2@23.459,28.881 S3.2@23.495,28.917
  Bottom Layer w0.3: S3.2@23.459,28.881 23.459,35.381 22.912,35.381 21.463,36.83 21.463,61.976 27.178,67.691 51.562,67.691 52.582,66.671 v2(52.582,63.25)
NetC4_2: C4.2 R8.1 S4.2 U6.40 | length 66.7
  Top Layer w0.3: U6.40 54.082,67.036 54.737,67.691 v2(56.388,67.691) ; C4.2 R8.1 80.482,29.873 80.482,28.881 80.951,28.881 82.423,30.353 82.423,33.44 S4.2@80.482,35.381
  Bottom Layer w0.3: v2(56.388,67.691) 64.389,67.691 72.771,59.309 72.771,39.116 74.383,37.504 78.359,37.504 S4.2@80.482,35.381
NetC8_2: C8.2 Q3.1 R21.1 | length 3.7
  Top Layer w0.5: Q3.1 46.236,15.875 C8.2 48.434,15.502 R21.1
NetC9_2: C9.2 Q4.1 R22.1 | length 5.3
  Top Layer w0.254: Q4.1 49.657,26.549 49.657,26.035 50.253,25.439 C9.2@51.181,25.439
  Top Layer w0.3: C9.2@51.181,25.439 R22.1
NetC10_2: C10.2 R24.1 U6.16 | length 58.7
  Top Layer w0.3: R24.1 38.243,26.623 C10.2 39.894,29.972 58.166,29.972 61.595,33.401 61.595,47.498 59.436,49.657 53.467,49.657 51.582,51.542 U6.16
NetC11_2: C11.2 R26.1 U6.15 | length 67
  Top Layer w0.3: C11.2 30.091,30.861 57.277,30.861 60.452,34.036 60.452,47.498 59.055,48.895 52.959,48.895 51.082,50.772 U6.15
  Top Layer w0.5: R26.1 28.241,29.171 C11.2
NetC12_2: C12.2 R27.1 U2.5 | length 7
  Top Layer w0.5: U2.5 36.314,21.463 C12.2 36.615,21.256 R27.1
NetC13_2: C13.2 R28.1 U2.3 | length 6.4
  Top Layer w0.5: R28.1@21.598,20.908 C13.2 U2.3
NetC15_2: C15.2 P3.1 R33.2 U6.17 | length 30.4
  Top Layer w0.3: U6.17 52.082,52.058 53.848,50.292 60.98,50.292 63.401,52.713 66.921,52.713 67.572,52.062 C15.2 R33.2 67.779,51.308 P3.1
NetC16_2: C16.2 Q5.1 R34.1 | length 4
  Top Layer w0.5: Q5.1 29.933,67.183 R34.1
NetC17_2: C17.2 Q6.1 R35.1 | length 3.8
  Top Layer w0.5: Q6.1 67.318,24.765 67.437,24.884 R35.1
NetC35_1: C35.1 U6.5 Y1.1 | length 14.3
  Top Layer w0.3: Y1.1 40.994,64.035 41.656,63.373 44.958,63.373 46.367,61.964 U6.5
  Top Layer w0.5: C35.1 39.335,63.873 Y1.1
NetC36_1: C36.1 R52.2 Y1.2 | length 8.2
  Top Layer w0.5: C36.1 39.362,59.047 40.679,60.364 R52.2
NetC40_2: C40.2 Q7.1 R54.1 | length 3.2
  Top Layer w0.4: R54.1 83.478,52.832 Q7.1 84.963,51.554 C40.2
NetD1_1: D1.1 R1.2 | length 2.9
  Top Layer w0.5: R1.2 31.27,35.171 D1.1
NetD1_2: D1.2 U6.11 | length 56.6
  Top Layer w0.254: U6.11 51.217,58.964 v2(52.07,59.817)
  Bottom Layer w0.254: D1.2 34.016,36.469 32.004,38.481 30.472,38.481 28.321,40.632 28.321,55.499 28.956,56.134 34.798,56.134 36.449,54.483 46.99,54.483 47.625,53.848 v2(48.006,53.848) 49.022,53.848 52.07,56.896 v2(52.07,59.817)
NetD2_1: D2.1 R2.2 | length 3.1
  Top Layer w0.5: R2.2 30.746,41.791 D2.1
NetD2_2: D2.2 U6.13 | length 39.5
  Top Layer w0.254: v2(48.514,52.451) 48.895,52.451 49.784,53.34 49.784,55.88 50.082,56.178 U6.13
  Bottom Layer w0.3: D2.2 34.016,41.803 29.464,46.355 29.464,52.705 30.861,54.102 35.56,54.102 35.814,53.848 46.482,53.848 47.879,52.451 v2(48.514,52.451)
NetD3_1: D3.1 R3.2 | length 2.8
  Top Layer w0.5: D3.1 69.33,41.283 R3.2
NetD3_2: D3.2 U6.36 | length 36.1
  Top Layer w0.254: U6.36 58.42,65.502 v2(58.42,65.532)
  Bottom Layer w0.3: v2(58.42,65.532) 64.135,65.532 64.643,65.024 64.643,60.706 69.723,55.626 69.723,45.72 66.568,42.565 D3.2
NetD4_1: D4.1 R4.2 | length 2.7
  Top Layer w0.5: D4.1 69.111,34.917 R4.2
NetD4_2: D4.2 U6.35 | length 41.4
  Top Layer w0.254: U6.35 58.384,63.464 v2(59.182,64.262)
  Bottom Layer w0.3: v2(59.182,64.262) 63.627,64.262 64.008,63.881 64.008,59.817 68.58,55.245 68.58,46.131 64.008,41.559 64.008,37.846 66.568,35.286 D4.2
NetD5_1: D5.1 J2.2 Q5.3 | length 10.7
  Top Layer w0.5: J2.2 14.438,67.945 D5.1 20.015,68.148 Q5.3
NetD5_2: D5.2 J2.1 R31.2 | length 13.7
  Top Layer w0.5: R31.2@7.2,65.405 11.978,65.405 J2.1 19.034,63.667 D5.2
NetD6_1: D6.1 Q6.3 RL1.2 | length 9.1
  Top Layer w0.5: RL1.2 66.04,19.178 D6.1 64.44,21.735 Q6.3
NetD6_2: D6.2 R32.2 RL1.1 | length 17
  Top Layer w0.5: RL1.1 69.54,17.978 D6.2 69.54,21.135 ; D6.2@69.596,20.135 D6.2@69.596,20.447 ; 69.54,21.247 69.596,21.191 R32.2 69.54,22.97 69.54,21.247
NetD8_1: D8.1 Q7.3 RL2.2 | length 18.6
  Top Layer w0.4: Q7.3 85.928,56.591 87.376,58.039 92.202,58.039 93.726,56.515 93.726,55.245 92.272,53.791 D8.1 95.124,50.852 RL2.2
NetD8_2: D8.2 R53.2 RL2.1 | length 6.1
  Top Layer w0.4: R53.2 D8.2 88.685,52.285 RL2.1
NetJ1_1: J1.1 U1.13 | length 38.9
  Top Layer w0.3: v3(32.639,47.625) 32.766,47.752 U1.13
  Bottom Layer w0.3: v3(32.639,47.625) 32.639,45.593 37.211,41.021 37.211,37.973 43.815,31.369 55.245,31.369 56.642,32.766 J1.1
NetJ1_2: J1.2 U1.12 | length 37.8
  Top Layer w0.3: v3(32.131,49.022) U1.12
  Bottom Layer w0.3: v3(32.131,49.022) 33.274,49.022 34.227,48.069 34.227,45.402 38.1,41.529 38.1,38.354 44.45,32.004 53.213,32.004 54.102,32.893 J1.2
NetJ1_3: J1.3 U1.16 | length 24.1
  Top Layer w0.3: U1.16 34.611,43.24 44.958,32.893 51.054,32.893 51.562,33.401 J1.3
NetJ1_4: J1.4 U1.11 | length 32.7
  Top Layer w0.3: v3(32.131,50.292) U1.11
  Bottom Layer w0.3: v3(32.131,50.292) 33.909,50.292 35.306,48.895 35.306,45.593 38.862,42.037 38.862,38.481 44.45,32.893 48.387,32.893 49.022,33.528 J1.4
NetJ1_5: J1.5 U1.15 | length 16.8
  Top Layer w0.3: U1.15 35.433,45.212 36.195,44.45 36.195,42.926 43.735,35.386 J1.5
NetJ1_7: J1.7 U1.9 | length 18.6
  Top Layer w0.3: v3(32.893,52.832) 34.223,52.832 34.417,53.026 U1.9
  Bottom Layer w0.3: v3(32.893,52.832) 34.036,52.832 35.433,51.435 42.291,51.435 43.942,49.784 J1.7
NetJ1_8: J1.8 U1.1 | length 8.3
  Top Layer w0.3: U1.1 40.767,43.942 41.402,43.307 45.339,43.307 46.482,44.45 J1.8
NetJ1_9: J1.9 U1.5 | length 10.9
  Top Layer w0.3: U1.5@39.938,48.895 U1.5 45.386,49.022 J1.9
NetJ1_10: J1.10 U1.14 | length 20.4
  Top Layer w0.3: U1.14 36.068,46.482 36.83,45.72 36.83,44.577 38.862,42.545 48.721,42.545 J1.10
NetJ1_11: J1.11 U1.8 | length 21.1
  Top Layer w0.3: v5(38.227,52.832) U1.8
  Bottom Layer w0.3: v5(38.227,52.832) 42.418,52.832 45.72,49.53 50.927,49.53 54.102,46.355 J1.11
NetJ1_12: J1.12 U1.6 | length 18.9
  Top Layer w0.3: U1.6 39.827,50.276 45.355,50.276 48.387,47.244 54.784,47.244 J1.12
NetM1_1: M1.1 R27.2 R30.2 | length 26.7
  Top Layer w0.5: R27.2 40.259,22.987 41.148,22.098 v2(42.291,22.098)
  Bottom Layer w0.5: v2(42.291,22.098) 42.291,11.789 R30.2
  Bottom Layer w1.8: R30.2 51.032,10.9 52.197,12.065 M1.1@52.197,13.335
NetM1_2: M1.2 Q2.2 | length 7.4
  Top Layer w1.8: M1.2 54.864,20.193 Q2.2
NetP1_1: P1.1 P1.2 Q1.2 | length 12
  Top Layer w3: P1.2@19.384,12.7 24.384,12.7 Q1.2@31.369,12.7
  other v1: 19.339,10.033 18.288,10.211 23.241,10.414 27.051,10.541 27.753,10.541 21.844,10.668 23.241,11.43 18.288,11.557 21.844,11.684 27.051,11.811 27.753,11.874 23.114,12.319 18.288,12.446 21.844,12.827 27.051,12.954 27.753,12.954 23.114,13.081 18.288,13.589 24.384,13.716 21.844,13.843 23.114,13.843 27.051,13.97 27.833,13.97
NetP2_1: P2.1 P2.2 R28.2 R29.2 | length 29.9
  Top Layer w0.5: R29.2 14.351,20.828 R28.2
  Top Layer w3: P2.1 P2.2
  Bottom Layer w3: R29.2@12.573,19.177 12.573,8.763 13.716,7.62 P2.1
NetP9_7: P9.7 RL2.3 | length 21.3
  Top Layer w2: RL2.3 90.424,37.123 91.821,35.726 P9.7@98.552,35.726
  Bottom Layer w2: RL2.3 90.424,37.123 91.821,35.726 P9.7@98.552,35.726
NetP9_8: P9.8 RL2.4 | length 16.3
  Top Layer w2: RL2.4 98.506,32.046 P9.8@98.552,32.092
  Bottom Layer w2: RL2.4 98.506,32.046 P9.8@98.552,32.092
NetP9_9: P9.9 RL1.3 | length 66.8
  Top Layer w2: RL1.3 74.111,13.914 88.839,28.642 P9.9
  Bottom Layer w2: RL1.3 74.111,13.913 88.84,28.642 P9.9
NetP9_10: P9.10 RL1.4 | length 50.8
  Top Layer w2: RL1.4 81.111,14.69 91.563,25.142 P9.10
  Bottom Layer w2: RL1.4 81.111,14.69 91.563,25.142 P9.10
NetQ1_1: Q1.1 Q3.3 R17.2 | length 6.5
  Top Layer w0.5: Q1.1 41.402,13.081 R17.2 43.905,13.755 Q3.3
NetQ2_1: Q2.1 Q4.3 R18.2 | length 4.6
  Top Layer w0.5: R18.2 47.928,22.948 47.987,23.006 Q4.3
NetR15_1: R15.1 U1.3 U6.22 | length 52
  Top Layer w0.254: U6.22 54.582,54.892 v2(55.499,53.975)
  Top Layer w0.3: v2(37.338,47.498) 38.354,46.482 U1.3 ; v2(49.022,40.259) 51.189,40.259 R15.1@51.435,40.013
  Bottom Layer w0.3: v2(37.338,47.498) 37.338,45.212 42.291,40.259 v2(49.022,40.259) 51.816,40.259 53.213,38.862 57.277,38.862 59.436,41.021 59.436,50.927 56.388,53.975 v2(55.499,53.975)
NetR16_1: R16.1 U1.2 U6.21 | length 43
  Top Layer w0.254: v2(54.082,53.848) U6.21
  Top Layer w0.3: U1.2@38.989,45.212 U1.2 v2(41.402,45.212) ; R16.1 55.761,39.759 v2(56.134,40.132)
  Bottom Layer w0.3: v2(41.402,45.212) 41.402,43.815 43.561,41.656 54.61,41.656 v2(56.134,40.132) 56.769,40.132 58.801,42.164 58.801,49.403 54.356,53.848 v2(54.082,53.848)
NetR19_1: R19.1 R24.2 U2.7 | length 6.2
  Top Layer w0.3: U2.7 32.385,24.003 33.87,25.488 R19.1 34.632,25.488 35.687,26.543 R24.2
NetR19_2: R19.2 R23.1 U2.6 | length 6.1
  Top Layer w0.5: U2.6 33.528,22.733 34.417,23.622 R19.2 35.091,23.788 36.068,24.765 R23.1
NetR20_1: R20.1 R26.2 U2.1 | length 5.3
  Top Layer w0.5: R20.1 25.071,26.377 26.162,25.286 R26.2
NetR20_2: R20.2 R25.1 U2.2 | length 4.8
  Top Layer w0.5: R25.1 23.456,24.638 R20.2 23.71,24.677 24.384,24.003 U2.2
NetR21_2: R21.2 U6.28 | length 57.8
  Top Layer w0.254: U6.28 60.94,59.964 v2(61.722,59.182)
  Top Layer w0.3: R21.2 50.077,13.882 49.989,13.97 v2(49.784,13.97)
  Bottom Layer w0.3: v2(49.784,13.97) 49.784,15.494 62.484,28.194 62.484,58.293 61.722,59.055 v2(61.722,59.182)
NetR22_2: R22.2 U6.27 | length 42.6
  Top Layer w0.254: U6.27 59.281,59.464 v2(59.944,58.801)
  Top Layer w0.3: R22.2 55.03,28.956 v2(60.579,28.956)
  Bottom Layer w0.254: v2(59.944,58.801) 60.325,58.801 60.833,58.293
  Bottom Layer w0.3: v2(60.579,28.956) 61.595,29.972 61.595,57.531 60.833,58.293
NetR34_2: R34.2 U6.12 | length 33.1
  Top Layer w0.3: R34.2 30.9,68.922 31.75,68.072 v2(31.75,58.039) ; v2(48.641,55.753) 48.782,55.894 U6.12
  Bottom Layer w0.3: v2(31.75,58.039) 34.163,58.039 36.83,55.372 48.26,55.372 v2(48.641,55.753)
NetR35_2: R35.2 U6.33 | length 49.3
  Top Layer w0.254: U6.33 60.432,62.464 61.087,63.119
  Top Layer w0.3: 61.087,63.119 v2(62.484,63.119) ; v2(64.008,27.686) 64.604,28.282 R35.2
  Bottom Layer w0.3: v2(62.484,63.119) 63.246,62.357 63.246,59.182 67.691,54.737 67.691,47.244 63.246,42.799 63.246,28.448 v2(64.008,27.686)
NetR41_2: R41.2 RT2.2 TVS1.2 U5.7 | length 15.7
  Top Layer w0.5: U5.7 81.407,66.04 82.042,66.675 R41.2 82.97,67.603 87.058,71.691 87.058,72.2 87.249,72.009 RT2.2
NetR42_1: R42.1 RT1.2 TVS2.1 U5.6 | length 13.3
  Top Layer w0.5: U5.6 79.414,64.731 R42.1 82.638,64.731 85.09,67.183 TVS2.1 86.995,67.31 RT1.2
NetR51_1: R51.1 U6.44 | length 2.8
  Top Layer w0.3: R51.1 52.082,67.845 U6.44
NetR52_1: R52.1 U6.6 | length 6
  Top Layer w0.3: R52.1 45.56,62.064 46.16,61.464 U6.6
NetR54_2: R54.2 U6.26 | length 32.7
  Top Layer w0.24: U6.26 58.052,58.964 59.231,57.785 62.357,57.785 64.386,59.814 74.927,59.814 76.073,60.96 80.01,60.96 83.439,57.531 R54.2
NRST: C39.2 P8.3 R50.2 U6.7 | length 40.3
  Top Layer w0.3: R50.2 43.133,54.745 C39.2 46.236,54.745 46.99,55.499 v2(46.99,56.769) ; v2(44.831,61.087) 44.954,60.964 U6.7 ; P8.3 61.849,69.723 62.992,68.58 v2(62.992,66.675)
  Bottom Layer w0.3: v2(44.831,61.087) 44.831,58.928 v2(46.99,56.769) 47.625,56.769 57.658,66.802 62.865,66.802 v2(62.992,66.675)
RXD: R40.2 U5.1 U6.31 | length 24
  Top Layer w0.3: U6.31 68.449,61.464 69.088,62.103 69.088,65.786 70.612,67.31 U5.1
  Top Layer w0.5: R40.2 73.533,67.564 U5.1
SWCLK: P8.5 R44.2 U6.37 | length 13.1
  Top Layer w0.3: R44.2 56.603,71.667 P8.5 57.912,70.358 57.912,66.421 56.755,65.264 U6.37
SWDIO: P8.4 R47.2 U6.34 | length 25.4
  Top Layer w0.254: U6.34 59.535,62.964 60.579,64.008 60.579,70.231 P8.4
  Top Layer w0.3: v2(48.641,71.628) 48.68,71.667 R47.2
  Bottom Layer w0.3: v2(48.641,71.628) 50.038,73.025 57.785,73.025 P8.4
TXD: R38.2 U5.4 U6.30 | length 26
  Top Layer w0.254: v2(68.58,68.58) 69.723,69.723 R38.2
  Top Layer w0.3: U6.30 69.219,60.964 71.755,63.5
  Top Layer w0.5: v2(70.993,64.262) 71.755,63.5 U5.4
  Bottom Layer w0.254: v2(68.58,68.58) 68.58,66.675 v2(70.993,64.262)
VHUM: C33.1 C37.2 P9.5 R45.1 U6.18 | length 62.3
  Top Layer w0.3: U6.18 52.582,52.828 54.483,50.927 60.583,50.927 65.282,55.626 70.358,55.626 73.017,52.967
  Top Layer w0.5: 73.017,52.967 C37.2 77.589,52.967 C33.1 80.01,52.578 v2(81.28,53.848)
  Bottom Layer w0.4: v2(81.28,53.848) 89.916,53.848 92.583,51.181 92.583,46.355 96.296,42.642 P9.5
VTEMP: C34.1 C38.2 P9.4 R46.1 U6.19 | length 61.1
  Top Layer w0.3: U6.19 53.082,53.344 54.864,51.562 60.19,51.562 65.208,56.58 70.547,56.58 72.144,54.983 C38.2 C38.2@73.525,55.245
  Top Layer w0.5: C38.2 79.748,54.983 v2(81.915,57.15)
  Bottom Layer w0.4: 88.138,57.15 93.472,51.816 93.472,47.498 94.828,46.142 P9.4
  Bottom Layer w0.5: v2(81.915,57.15) 88.138,57.15
pads on no net: M1.3 U1.7 U6.2 U6.3 U6.4 U6.10 U6.14 U6.20 U6.25 U6.32 U6.38 U6.39 U6.45 U6.46

## Polygon pours and split planes (outlines as drawn)
GND on Top Layer "Bottom Layer-No Net" (solid, remove dead copper, pour order 4): 0.113,26.416 6.153,26.416 10.228,19.005 40.589,20.356 40.589,9.708 66.337,9.708 66.337,14.955 71.036,19.654 71.29,19.908 71.29,27.147 72.687,27.147 77.513,28.544 80.053,28.29 81.958,29.179 83.228,31.211 84.893,35.56 83.863,38.323 89.719,43.053 95.189,42.156 96.577,38.323 100.5,38.323 100.5,74.391 99.611,75.28 99.484,75.153 65.321,75.153 0.113,75.153 0.043,75.223
GND on Bottom Layer "Bottom Layer-No Net" (solid, remove dead copper, pour order 6): 0,75 100.541,75 100.552,74.988 100.5,74.936 100.5,37.746 93.072,42.329 87.387,42.329 82.404,31.661 74.93,29.872 74.295,29.872 70.231,25.808 65.894,21.471 65.894,8.9 36.339,8.9 36.068,9.171 36.195,9.298 36.195,21.617 5.334,21.617 0,26.951 -0.038,26.989 -0.038,74.992

## Keep-outs
Keep-Out Layer:
  lines w0.2: 83.5,0 100.5,0 100.5,75 ; 83.5,0.061 83.5,9 16.5,9 16.5,0 0,0 0,75 100.514,75 ; 80.772,26.289 88.9,34.417 101.727,34.417 101.727,33.401 101.6,33.401 93.345,33.401 89.662,33.401 81.661,25.4 81.534,25.527 80.772,26.289 ; 89.281,29.972 89.281,30.734 101.727,30.734 101.727,29.845 101.6,29.972 89.281,29.972 ; 92.71,26.543 92.71,27.305 105.156,27.305 105.156,26.416 105.029,26.543 92.71,26.543 ; 93.345,37.084 105.664,37.084 105.791,36.957 105.791,37.846 93.345,37.846 93.345,37.084 ; 95.123,19.558 95.123,20.32 107.569,20.32 107.569,19.431 107.442,19.558 95.123,19.558

## Other copper
Top Layer:
  rectangle net GND: 0.508,5.969 5.08,21.039
  rectangle net NetP1_1: 17.653,9.652 34.798,14.224
  rectangle net 12V: 1.651,0.635 9.906,4.191
Bottom Layer:
  rectangle net GND: 0.381,6.35 4.953,21.082
  rectangle net NetP2_1: 10.795,1.016 15.367,21.082
  rectangle net NetP1_1: 17.526,9.652 39.37,20.574
  rectangle net 12V: 1.651,0.635 9.906,4.191

## Silkscreen, mask and mechanical layers (free items; w line width, h text height)
Top Overlay:
  circle w0.2: c31.52,41 r0.781
  circle w0.2: c31.52,34.96 r0.991
  circle w0.2: c66.57,41 r1.047
  circle w0.2: c66.57,34.925 r1.154
  circle w2: c76.962,23.749 r3
  circle w2: c85.471,46.355 r3
  circle w2: c13.97,28.956 r3
  circle w2: c13.97,46.99 r3
  lines w0.3: 19,46.786 19,47.6 19,48.564 ; 65,34.96 68.199,34.96 ; 96.266,21 100.5,21 ; 98.56,50.554 98.56,53.22 ; 98.56,55.872 98.56,53.22 ; 100.5,75 100.5,53.22 98.56,53.22
Top Solder:
  rectangle: 17.526,9.652 35.052,14.224
  rectangle: 0.381,5.969 4.953,21.017
  rectangle: 2.159,0.889 9.779,4.191
  rectangle: 12.319,2.286 15.113,8.128
  lines w1.5: 39.751,18.415 47.625,18.415
  lines w1.8: 86.924,14.026 94.488,21.59 98.425,21.59
  lines w2: 86.924,14.026 86.924,12.573 86.924,9.342 87.63,8.636 87.63,8.128 ; 94.869,9.017 94.869,11.628 93.924,12.573 95.504,12.573 98.552,15.621 98.552,18.415 ; 98.425,21.59 98.552,21.717
  lines w2.1: 15.402,16.002 15.656,16.256 23.241,16.256 25.4,18.415 25.781,18.415 ; 38.989,15.367 38.989,18.415 39.116,18.542
  lines w2.5: 8.382,7.747 8.382,9.271 15.113,16.002 15.402,16.002 ; 25.781,18.415 39.497,18.415 ; 87.884,3.175 87.884,8.175 ; 94.869,3.429 94.869,8.429
  lines w2.6: 8.128,2.667 8.382,2.921 8.382,8.001
Bottom Solder:
  rectangle: 0.508,6.096 5.08,20.955
  rectangle: 10.922,1.143 15.494,20.955
  rectangle: 17.907,10.033 39.116,19.431
  rectangle: 2.032,0.762 9.779,4.191
  rectangle: 12.065,7.493 14.605,20.447
  rectangle: 12.446,2.413 14.986,8.128
  lines w1.6: 74.111,11.049 74.111,14.04 ; 74.111,11.5 74.111,14.04 ; 81.111,11.049 81.111,14.69 91.567,25.146 98.201,25.146 98.205,25.142 ; 98.552,28.642 88.713,28.642 74.111,14.04
  lines w1.8: 94.107,12.573 93.924,12.573 98.552,17.201
  lines w2: 86.924,9.342 86.924,12.573 86.924,14.026 94.54,21.642 98.552,21.642
  lines w3: 87.884,3.175 87.884,8.175 ; 94.107,12.573 94.869,11.811 94.869,8.429 94.869,3.429
Mechanical 1:
  circle w0.2: c14,47 r2.2
  circle w0.2: c77,23.7 r2.2
  circle w0.2: c85.471,46.355 r2.2
  circle w0.2: c14,29 r2.2

## Text inside footprints (layer, text, board x,y; h text height)
J1: Bottom Overlay "1" at 59.055,35.179 h0.8
Q1: Top Overlay "2" at 38.684,13.081 h0.8 r90; Top Overlay "3" at 37.668,16.688 h0.8 r90; Top Overlay "1" at 37.617,10.135 h0.8 r90
Q2: Top Overlay "1" at 48.997,24.663 h0.8 r270; Top Overlay "3" at 48.946,18.11 h0.8 r270; Top Overlay "2" at 47.93,21.717 h0.8 r270
U4: Top Overlay "1" at 9.931,34.9 h0.8 r90; Top Overlay "3" at 9.982,41.453 h0.8 r90; Top Overlay "2" at 10.998,37.846 h0.8 r90